# EAGLE board disp_breakout (EAGLE 7.7.0)
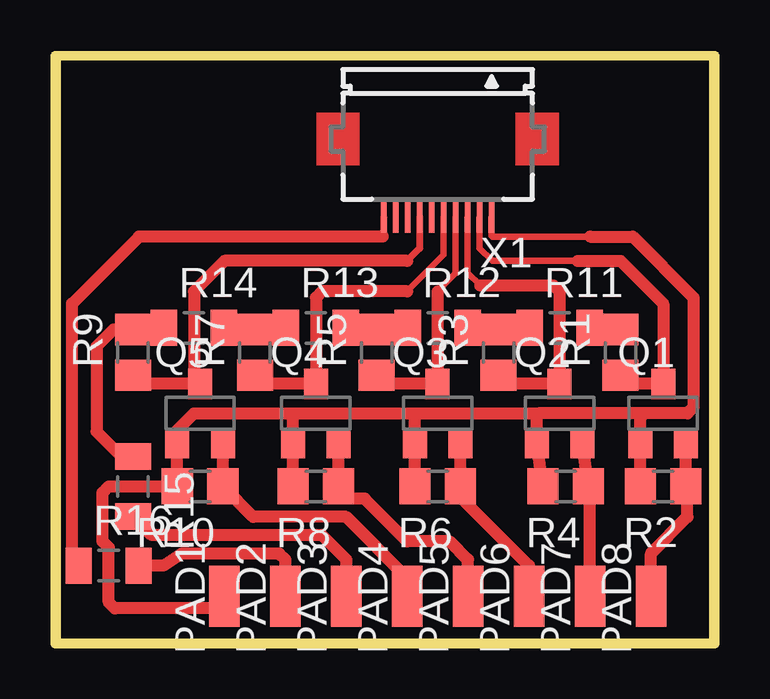
[diagram p0: board, top side]

Size 27.1 x 24.12 mm. Coordinates in mm from the lower left corner, seen from the top.
Outline: 0,0 27.1,0 27.1,24.12 0,24.12 0,0
Copper layers (1*16): Top 0.035mm / dielectric 1.5mm / Bottom 0.035mm
Design rules "default": minimum track width 10mil, minimum drill 24mil, track to track 8mil, track to pad 8mil, pad to pad 8mil, via to via 8mil, smd to smd 8mil, copper to edge 40mil, drill to drill 8mil, minimum pad ring 10mil, minimum via ring 8mil, stop-mask expansion 4mil, vias tented up to drill 0mil, thermal gap 10mil
Milling: 4 lines

## Footprints (pad centres in the part's own frame; a part is rotated, then mirrored left to right if it is on the bottom)
SMD1,27-2,54 = smd 1.27 x 2.54: 1 0,0
SOT23 = smd 1 x 1.27: 1 -0.95,-1.227; 2 0.95,-1.227; 3 0,1.227
R0805 = smd 1.3 x 1.5: 1 -0.95,0; 2 0.95,0
R0805BR = smd 1.1 x 1.5: 1 -1.25,0; 2 1.25,0
FH12-10S-0.5SH = smd 0.229 x 1.3: 1 -2.25,3.25; 2 -1.75,3.25; 3 -1.25,3.25; 4 -0.75,3.25; 5 -0.25,3.25; 6 0.25,3.25; 7 0.75,3.25; 8 1.25,3.25; 9 1.75,3.25; 10 2.25,3.25

## Placement (x,y rotation side)
PAD1  Vcc  [SMD1,27-2,54]  6.86,1.78 0 top
PAD2  GND  [SMD1,27-2,54]  9.4,1.78 0 top
PAD3  Vdd  [SMD1,27-2,54]  11.94,1.78 0 top
PAD4  PD  [SMD1,27-2,54]  14.48,1.78 0 top
PAD5  CS  [SMD1,27-2,54]  17.02,1.78 0 top
PAD6  MOSI  [SMD1,27-2,54]  19.56,1.78 0 top
PAD7  MISO  [SMD1,27-2,54]  22.1,1.78 0 top
PAD8  SCK  [SMD1,27-2,54]  24.64,1.78 0 top
Q1  AO3414  [SOT23]  25.15,9.4 0 top
Q2  AO3414  [SOT23]  20.83,9.4 0 top
Q3  AO3414  [SOT23]  15.75,9.4 0 top
Q4  AO3414  [SOT23]  10.67,9.4 0 top
Q5  AO3414  [SOT23]  5.84,9.4 0 top
R1  10k  [R0805]  23.37,11.94 90 top
R2  10k  [R0805]  25.15,6.35 180 top
R3  10k  [R0805]  18.29,11.94 90 top
R4  10k  [R0805]  21.08,6.35 180 top
R5  10k  [R0805]  13.21,11.94 90 top
R6  10k  [R0805]  15.75,6.35 180 top
R7  10k  [R0805]  8.13,11.94 90 top
R8  10k  [R0805]  10.67,6.35 180 top
R9  10k  [R0805]  3.05,11.94 90 top
R10  10k  [R0805]  5.84,6.35 180 top
R11  0  [R0805BR]  20.83,12.95 0 top
R12  0  [R0805BR]  15.75,12.95 0 top
R13  0  [R0805BR]  10.67,12.95 0 top
R14  0  [R0805BR]  5.59,12.95 0 top
R15  0  [R0805BR]  3.05,6.35 270 top
R16  0  [R0805BR]  2.03,3.05 0 top
X1  FH12-10S-0.5SH  [FH12-10S-0.5SH]  15.75,20.83 180 top

## Library data of the parts
PAD1-PAD8 = wirepad
Q1-Q5 = adafruit
R1-R10 = resistor
R11-R16 = custom
X1 = con-hirose; MPN: FH12-10S-0.5SH(55); OC_FARNELL: 1324540; OC_NEWARK: 34M6152

## Nets
CSH: PAD5.1 Q4.2 R8.1
CSL: Q4.3 R7.1 X1.5
GND: R16.1 X1.10
GND0: PAD2.1 R16.2
MISOH: PAD7.1 Q2.2 R4.1
MISOL: Q2.3 R3.1 X1.3
MOSIH: PAD6.1 Q3.2 R6.1
MOSIL: Q3.3 R5.1 X1.4
PDH: PAD4.1 Q5.2 R10.1
PDL: Q5.3 R9.1 X1.7
SCKH: PAD8.1 Q1.2 R2.1
SCKL: Q1.3 R1.1 X1.2
VCC: PAD1.1 Q1.1 Q2.1 Q3.1 Q4.1 Q5.1 R2.2 R4.2 R6.2 R8.2 R10.2 X1.1
VDD: R1.2 R11.2
VDD0: PAD3.1 R15.2
VDD1: R3.2 R11.1 R12.2
VDD2: R5.2 R12.1 R13.2
VDD3: R7.2 R13.1 R14.2
VDD4: R9.2 R14.1 R15.1

## Tracks (layer width: path | path; a pad name or v marks a point on that pad's centre or on a via)
CSH
  Top 0.5: Q4.2 R8.1 11.62,6.03 11.43,5.84 12.7,5.84 14.48,4.06 16.26,4.06 17.02,3.3 PAD5.1
CSL
  Top 0.275: X1.5 16,16 14.48,14.48
  Top 0.5: R7.1 8.49,10.62 Q4.3 10.67,14.22 10.92,14.48 14.48,14.48
GND
  Top 0.3: X1.10 13.5,16.8 13.46,16.76
  Top 0.5: 13.46,16.76 3.3,16.76 0.51,13.97 0.51,3.32 R16.1
GND0
  Top 0.5: PAD2.1 9.4,3.3 9.14,3.56 5.08,3.56 4.32,3.05 R16.2
MISOH
  Top 0.5: Q2.2 R4.1 22.1,6.28 PAD7.1
MISOL
  Top 0.275: X1.3 17,15.26 17.53,14.73
  Top 0.5: R3.1 18.65,10.62 Q2.3 20.83,14.48 20.57,14.73 17.53,14.73
MOSIH
  Top 0.5: Q3.2 R6.1 16.76,6.28 16.76,5.84 19.56,3.05 PAD6.1
MOSIL
  Top 0.275: X1.4 16.5,15.23 15.75,14.48
  Top 0.5: R5.1 13.57,10.62 Q3.3 15.75,14.48
PDH
  Top 0.5: Q5.2 R10.1 8.06,5.08 11.94,5.08 14.48,2.54 PAD4.1
PDL
  Top 0.3: X1.7 15,16.27 14.48,15.75
  Top 0.5: R9.1 3.41,10.62 Q5.3 5.59,10.62 5.59,14.48 6.86,15.75 14.48,15.75
SCKH
  Top 0.5: Q1.2 R2.1 26.16,6.28 26.16,5.08 24.64,3.56 PAD8.1
SCKL
  Top 0.275: X1.2 17.5,16.28 18.03,15.75 21.59,15.75
  Top 0.5: R1.1 23.73,10.62 Q1.3 25.15,13.97 23.37,15.75 21.59,15.75
VCC
  Top 0.275: X1.1 18,16.8 18.03,16.76 22.1,16.76
  Top 0.3: 19.94,9.4 19.88,9.33
  Top 0.5: R8.2 Q4.1 9.72,9.33 9.65,9.4 | R6.2 Q3.1 14.8,9.33 14.73,9.4 | R4.2 Q2.1 19.88,9.33 19.81,9.4 14.73,9.4 | R2.2 Q1.1 24.2,9.21 24.38,9.4 | 9.65,9.4 5.59,9.4 4.64,8.45 Q5.1 R10.2 2.03,6.35 1.78,6.1 1.78,4.06 2.03,3.81 2.03,1.52 2.29,1.27 6.35,1.27 PAD1.1 | 9.65,9.4 14.73,9.4 | 24.38,9.4 26.16,9.4 26.42,9.65 26.42,14.22 23.88,16.76 22.1,16.76 | 24.38,9.4 19.94,9.4
VDD
  Top 0.5: R11.2 R1.2
VDD0
  Top 0.5: PAD3.1 11.94,3.3 10.92,4.32 3.83,4.32 R15.2
VDD1
  Top 0.5: R12.2 R3.2 R11.1
VDD2
  Top 0.5: R13.2 R5.2 R12.1
VDD3
  Top 0.5: R14.2 8.06,12.95 R7.2 9.35,12.89 R13.1
VDD4
  Top 0.5: R14.1 4.27,12.89 R9.2 2.22,12.89 1.52,12.19 1.52,8.64 2.56,7.6 R15.1